# EAGLE board reg_pos (EAGLE 5.06)
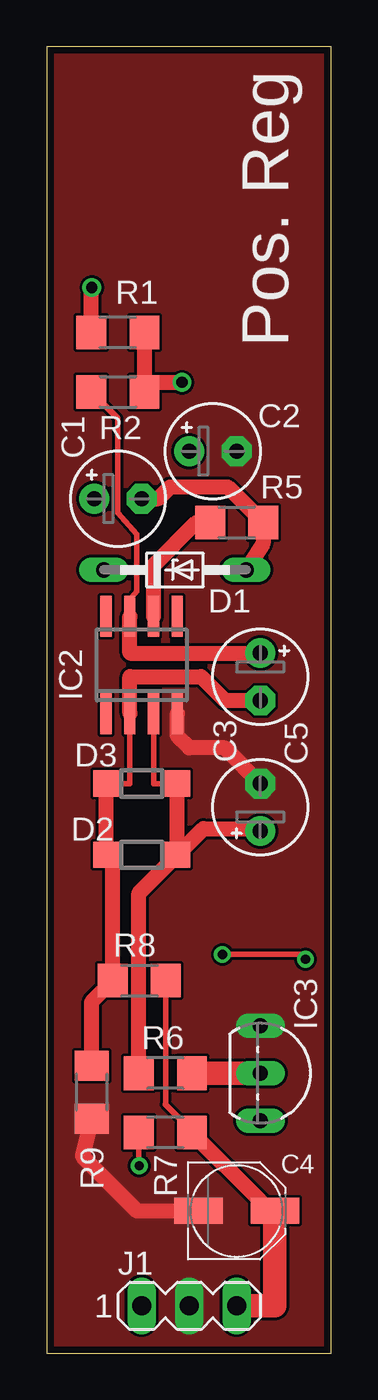
[diagram p0: board, top side]
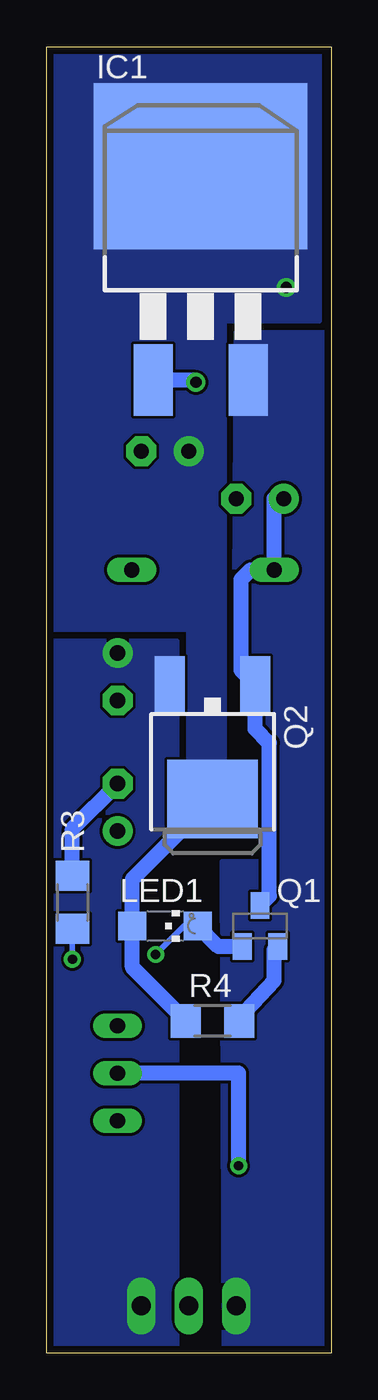
[diagram p1: board, bottom side, seen from below]

Size 15.22 x 69.9 mm. Coordinates in mm from the lower left corner, seen from the top.
Outline: 0,0 15.22,0 15.22,69.9 0,69.9 0,0
Copper layers (1*16): Top 0.035mm / dielectric 1.5mm / Bottom 0.035mm
Design rules "6mils *": minimum track width 8mil, minimum drill 15mil, track to track 6mil, track to pad 6mil, pad to pad 6mil, via to via 6mil, smd to smd 6mil, copper to edge 15mil, drill to drill 8mil, minimum pad ring 10mil, minimum via ring 8mil, stop-mask expansion 4mil, vias tented up to drill 0mil, thermal gap 0mil

## Footprints (pad centres in the part's own frame; a part is rotated, then mirrored left to right if it is on the bottom)
E2,5-5 = drill 0.813 pad 1.6 round: + -1.27,0 | drill 0.813 pad 1.6 octagon: - 1.27,0
PANASONIC_C = smd 2.6 x 1.4: + 2.05,0; - -2.05,0
DO34Z7 = drill 0.813 long: A 3.81,0; C -3.81,0
SOD123 = smd 1.4 x 1.4: A 1.9,0; C -1.9,0
D2PACK = smd 2.083 x 3.81: 1 -2.54,-8.89; 3 2.54,-8.89 | smd 11.43 x 8.89: 2 0,2.54
SO8 = smd 0.6 x 2.2: 1 -1.905,-2.6; 2 -0.635,-2.6; 3 0.635,-2.6; 4 1.905,-2.6; 5 1.905,2.6; 6 0.635,2.6; 7 -0.635,2.6; 8 -1.905,2.6
TO92-LINE = drill 0.813 long: 1 2.54,0; 2 0,0; 3 -2.54,0
MA03-1 = drill 1.016 long: 1 -2.54,0; 2 0,0; 3 2.54,0
CHIPLED_1206 = smd 1.5 x 1.5: A 0,-1.75; C 0,1.75
SOT23-BEC = smd 1 x 1.4: B -0.95,-1.1; C 0,1.1; E 0.95,-1.1
DPAK = smd 1.6 x 3: 1 -2.28,-4.04; 3 2.28,-4.04 | smd 4.826 x 4.191: 2 0,2.096
R1206 = smd 1.6 x 1.803: 1 -1.422,0; 2 1.422,0

## Placement (x,y rotation side)
C1  120u  [E2,5-5]  3.81,45.72 0 top
C2  120u  [E2,5-5]  8.89,48.26 0 top
C3  120u  [E2,5-5]  11.43,29.21 90 top
C4  100u  [PANASONIC_C]  10.16,7.62 0 top
C5  120u  [E2,5-5]  11.43,36.2 270 top
D1  1N5235B  [DO34Z7]  6.86,41.91 0 top
D2  1N4148_SMD  [SOD123]  5.08,26.67 0 top
D3  1N4148_SMD  [SOD123]  5.08,30.48 180 top
IC1  LM317BD2T  [D2PACK]  6.99,60.96 0 bottom
IC2  AD825  [SO8]  5.08,36.83 0 top
IC3  LM329DZ  [TO92-LINE]  11.43,14.99 270 top
J1  Header  [MA03-1]  7.62,2.54 0 top
LED1  Green  [CHIPLED_1206]  8.89,22.86 270 bottom
Q1  BC856BSMD  [SOT23-BEC]  3.81,22.86 0 bottom
Q2  D44H11MT  [DPAK]  6.35,31.75 180 bottom
R1  1k  [R1206]  3.81,54.61 0 top
R2  825  [R1206]  3.81,51.44 180 top
R3  12k  [R1206]  13.84,24.13 90 bottom
R4  82.5  [R1206]  6.35,17.78 0 bottom
R5  10  [R1206]  10.16,44.45 180 top
R6  499  [R1206]  6.35,14.99 0 top
R7  4.99k  [R1206]  6.35,11.81 0 top
R8  1.17k  [R1206]  4.95,19.94 180 top
R9  1k  [R1206]  2.41,13.97 270 top

## Library data of the parts
C1-C5 R1-R9 = rcl
D1 = diode
D2 D3 = smps
IC1 = v-reg
IC2 = analog-devices
IC3 Q2 = cdp
J1 = con-lstb
LED1 = led
Q1 = transistor-pnp

## Nets
BASE: C1.+ D1.C Q1.C Q2.1
GND: C2.- C3.- C4.- IC2.4 IC3.3 J1.2 R3.2 R9.2
IN: IC1.3 J1.1
N$2: IC1.1 R1.2 R2.1
N$3: C3.+ D2.A D3.C IC2.3 R6.1
N$5: C5.- D2.C D3.A IC2.2 R8.2 R9.1
N$6: IC3.2 R6.2 R7.1
N$7: IC2.6 R5.2
N$8: LED1.C Q1.B R3.1
N$9: Q1.E R4.2
N$11: C1.- D1.A R5.1
OUT: C4.+ C5.+ IC2.7 J1.3 Q2.3 R2.2 R7.2 R8.1
PREOUT: C2.+ IC1.2 LED1.A Q2.2 R1.1 R4.1

## Tracks (layer width: path | path; a pad name or v marks a point on that pad's centre or on a via)
BASE
  Bottom 0.813: C1.+ 3.05,45.72 D1.C 4.32,41.91 4.83,41.4 4.83,36.55 Q2.1 4.07,35.69 4.06,35.69 4.06,33.4 3.3,32.64 3.3,24.47 Q1.C
GND
  Top 0.813: IC2.4 6.99,33.02 7.62,32.38 9.53,32.38 C3.- | C4.- 4.83,7.62 1.91,10.54 R9.2
  Bottom 0.813: R3.2 13.84,28.07 C3.-
  pour Top: 0.25,69.6 15.11,69.6 15.11,0.13 0.25,0.13
IN
  pour Bottom: 0,54.61 5.08,54.61 5.21,31.5 4.06,31.5 3.56,26.29 5.84,26.29 5.71,0 0,0
N$2  (via drill 0.6)
  Top 0.813: R1.2 R2.1 5.74,51.94 v7.24,51.94
  Bottom 0.813: IC1.1 7.37,52.07 v7.24,51.94
N$3
  Top 0.305: D3.C 5.71,30.48 IC2.3
  Top 0.813: D2.A D3.C | R6.1 4.93,24.62 D2.A | C3.+ 11.3,28.07 8.38,28.07 D2.A
N$5
  Top 0.305: D3.A 4.45,30.48 IC2.2 | R9.1 2.41,15.62
  Top 0.813: D3.A D2.C 3.53,26.32 R8.2 2.41,18.82 2.41,15.62 | C5.- 9.53,34.92 8.26,36.2 4.45,36.2 IC2.2
N$6  (via drill 0.5)
  Top 0.305: 4.93,12.14 4.93,10.06 v4.95,10.03
  Top 0.406: 4.93,12.14 R7.1
  Top 1.27: IC3.2 R6.2
  Bottom 0.813: IC3.2 4.95,14.99 v4.95,10.03
N$7
  Top 0.813: R5.2 8,44.45 5.71,42.16 IC2.6
N$8  (via drill 0.5)
  Top 0.305: v9.4,21.34 13.59,21.34 v13.84,21.08
  Bottom 0.305: LED1.C 7.87,22.86 v9.4,21.34 | v13.84,21.08 R3.1
  Bottom 0.813: Q1.B 6.04,21.76 LED1.C
N$9
  Bottom 0.813: R4.2 4.93,17.93 3.05,19.94 3.05,21.57 Q1.E
N$11
  Top 0.813: D1.A 11.58,43.33 R5.1 9.68,46.35 6.6,46.35 5.97,45.72 C1.-
OUT
  Top 0.305: IC2.7 4.45,40.32 4.83,40.77 4.83,43.81 3.81,44.96 3.81,50.01 R2.2 | R7.2 7.77,11.91 6.35,13.34 6.38,13.36 R8.1
  Top 0.813: C4.+ 11.43,7.62 11.43,8.15 R7.2 | IC2.7 4.45,37.47 C5.+
  Top 1.27: J1.3 12.21,2.54 C4.+
  pour Bottom: 15.24,0 15.24,38.1 8.26,38.1 8.26,0
PREOUT  (via drill 0.6)
  Top 0.813: R1.1 2.39,57 v2.41,57.02
  Bottom 0.813: R4.1 10.64,20.65 LED1.A 10.64,25.36 Q2.2
  pour Bottom: 0.64,69.85 15.24,69.85 15.24,38.73 7.62,38.73 7.62,27.94 5.71,27.94 5.71,55.24 0.64,55.24

## Text on the board
tPlace: Pos. Reg